# Altium PCB PCB1.PcbDoc
Units mil, origin at the board's own origin, x right, y up, seen from the top; angles counter-clockwise.
Board outline 3797.64 x 3149.61 mil, 2 copper layers (Top Layer, Bottom Layer); 74 components, 106 nets, 398 pads, 67 vias.
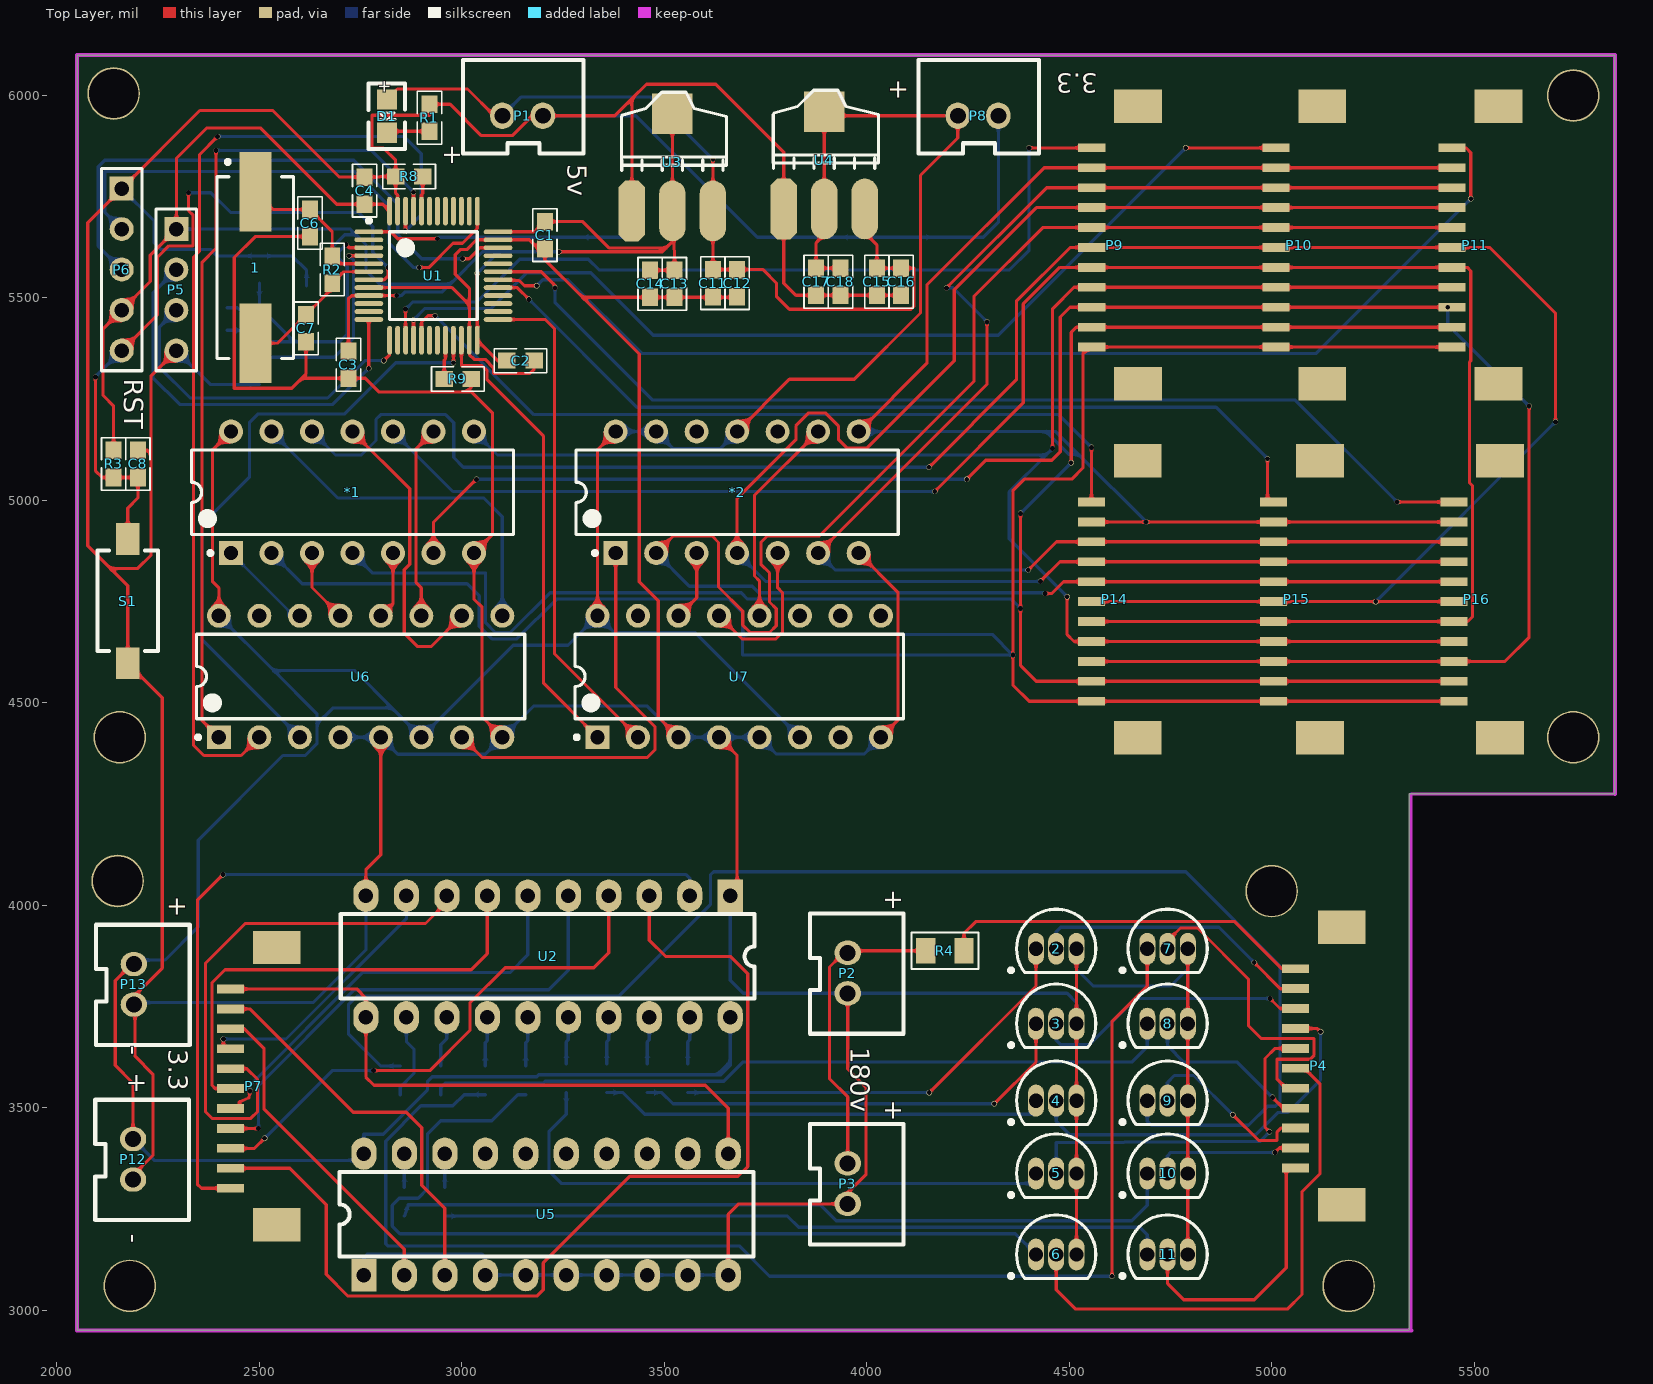
[diagram p0: Top Layer view]
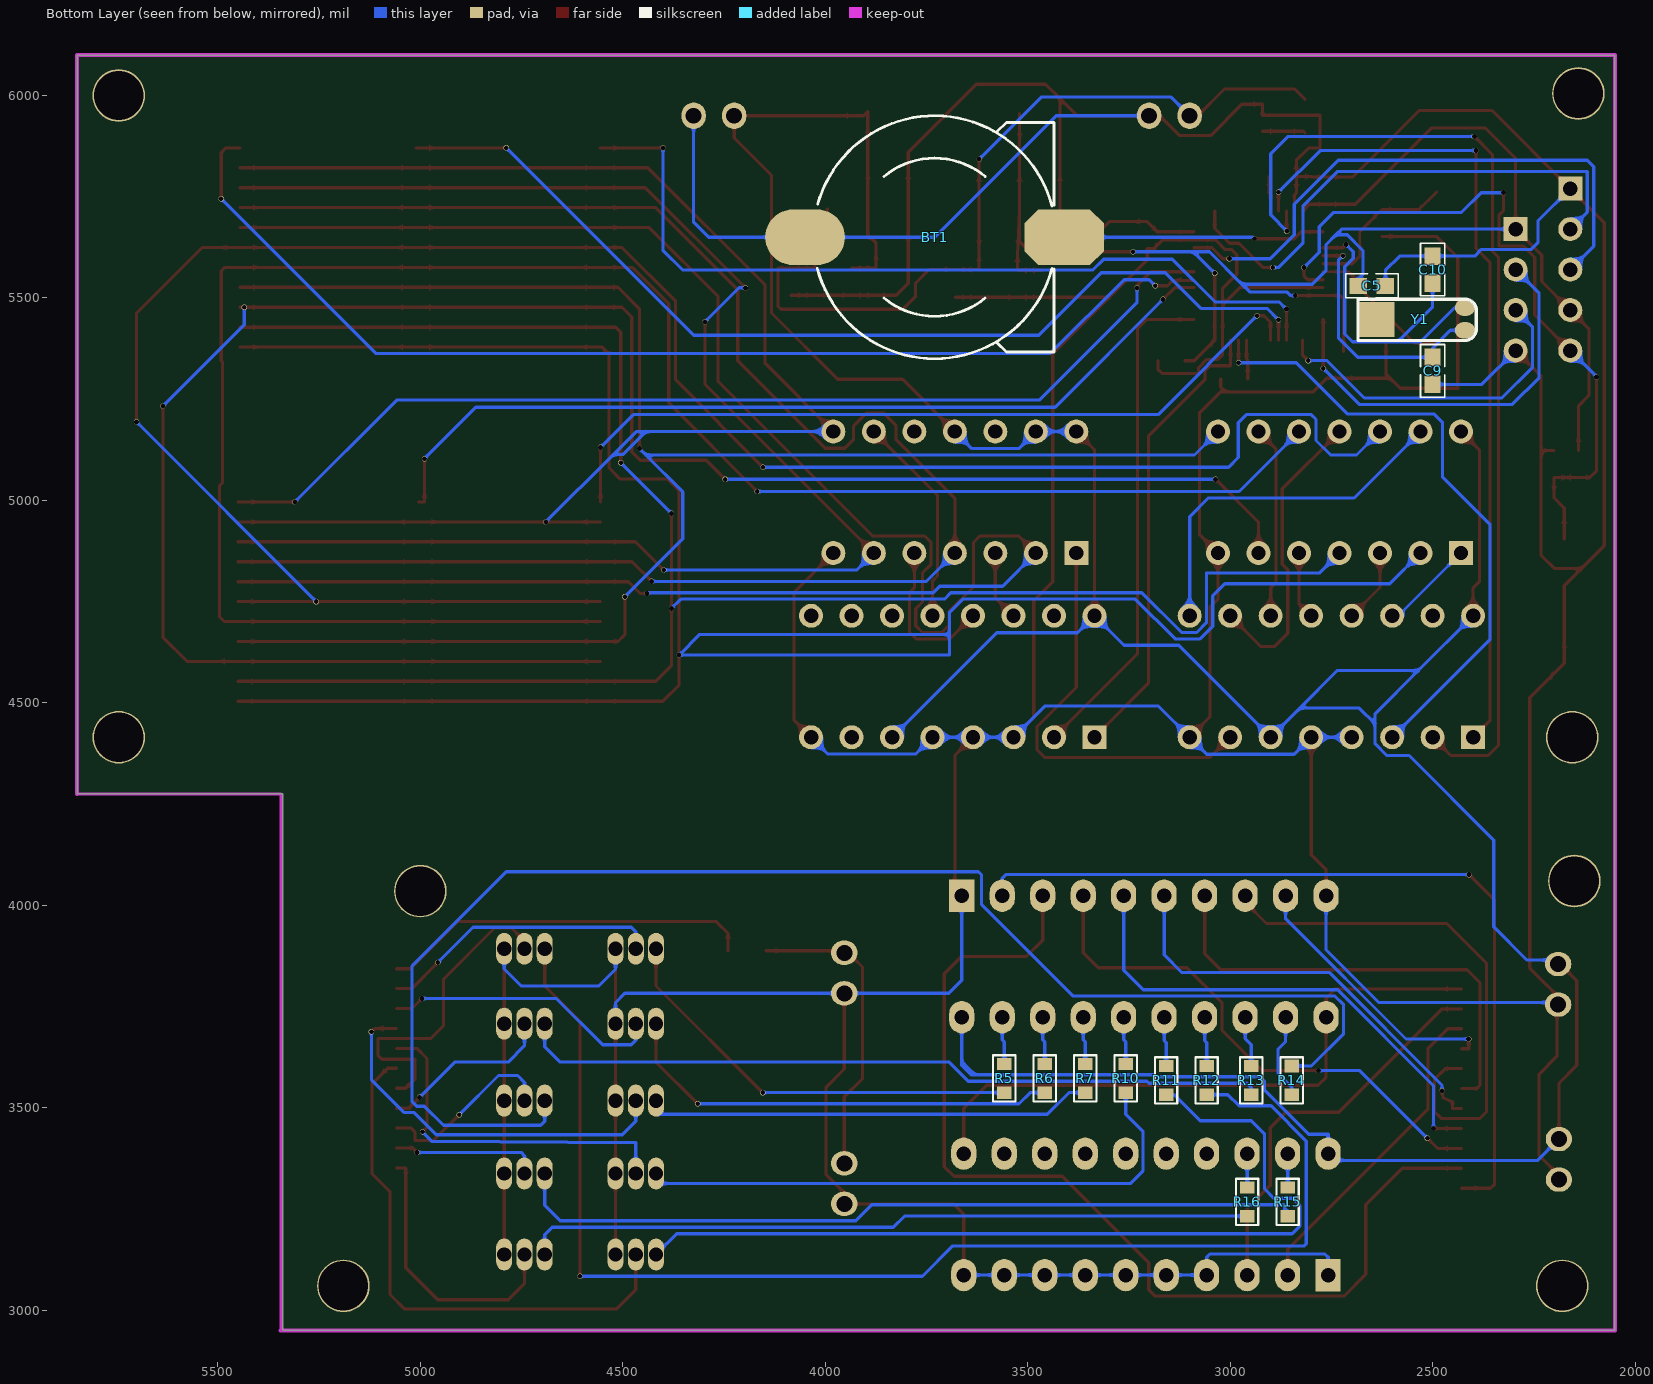
[diagram p1: Bottom Layer view, seen from below]
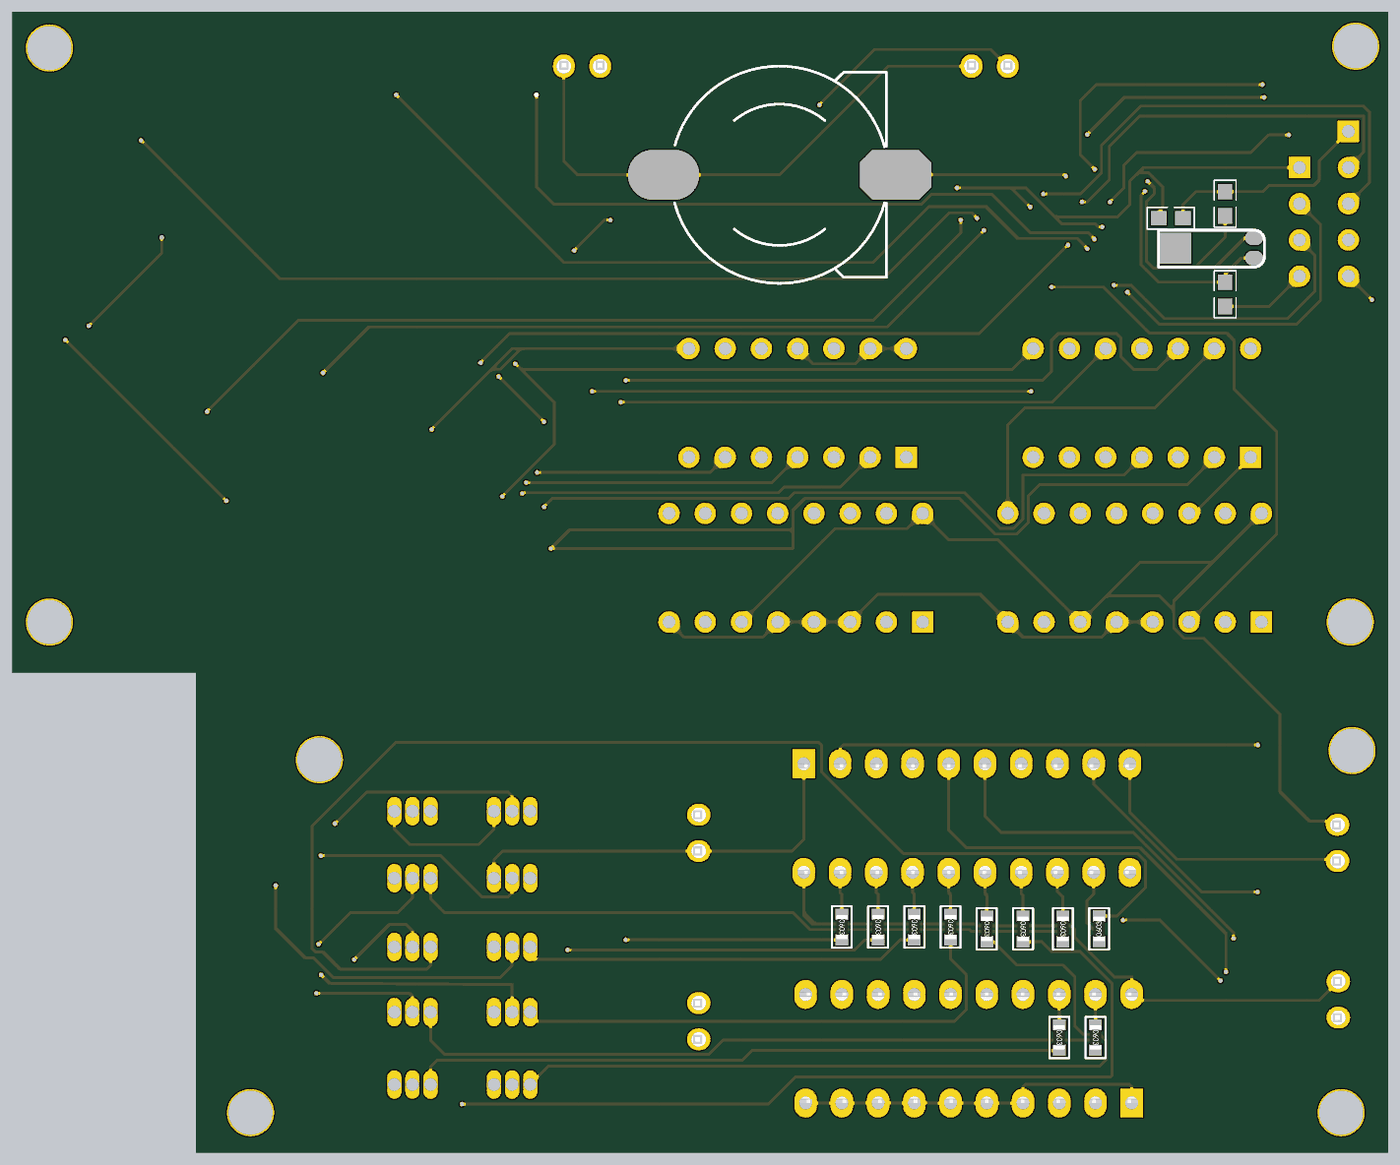
[diagram p2: 3D render of the assembled board from below, using the file's embedded part models]

## Layer stack, top to bottom
Top Solder: solder mask 0.4, Solder Resist, Dk 3.5
Top Layer: signal copper 1.4
Dielectric 1: dielectric 12.6, FR-4, Dk 4.8
Bottom Layer: signal copper 1.4
Bottom Solder: solder mask 0.4, Solder Resist, Dk 3.5

## Board outline
2050,2950 2050,6099.61 5847.64,6099.61 5847.64,4275 5340,4275 5340,2950

## Design rules (kind name [scope] priority, off if disabled: settings)
Clearance [All] p1: gap=7.87
PolygonConnect [All] p1: connectstyle=Relief reliefconductorwidth=10 reliefentries=4 polygonreliefangle="90 Angle" airgapwidth=10
RoutingVias [All] p1: holewidth=12 width=13 viastyle="Through Hole" minholewidth=12 minwidth=12 maxholewidth=28 maxwidth=50
SolderMaskExpansion [All] p1: expansion=4
Width [All] p1: maxlimit=200 minlimit=7 preferedwidth=7.87
30 further rules are at their usual default settings.

## Components (designator, comment, footprint, x,y, rotation, side; value= is the part's Value field where it differs from the comment)
1 "XTAL" 49S-SMD 2490,5575 r270 top
2 "13001" TO-92A 4468,3892.72 r270 top
3 "13001" TO-92A 4468,3707.72 r270 top
4 "13001" TO-92A 4468,3517.72 r270 top
5 "13001" TO-92A 4468,3337.72 r270 top
6 "13001" TO-92A 4468,3137.72 r270 top
7 "13001" TO-92A 4743,3892.72 r270 top
8 "13001" TO-92A 4743,3707.72 r270 top
9 "13001" TO-92A 4743,3517.72 r270 top
10 "13001" TO-92A 4743,3337.72 r270 top
11 "13001" TO-92A 4743,3137.72 r270 top
*1 "74hc04" DIP-14 2730,5020 r90 top
*2 "74hc04" DIP-14 3680,5020 r90 top
BT1 "Battery" CR1220 3730,5650 r90 bottom
C1 "Cap" 0603-1 3205,5655 r270 top
C2 "Cap" 0603-1 3145,5345 r0 top
C3 "Cap" 0603-1 2720,5335 r270 top
C4 "Cap" 0603-1 2760,5765 r90 top
C5 "Cap" 0603-1 2650,5530 r180 bottom
C6 "" 0603-1 2625,5685 r90 top
C7 "" 0603-1 2615,5425 r270 top
C8 "Cap" 0603-1 2200,5090 r270 top
C9 "" 0603-1 2500,5320 r90 bottom
C10 "" 0603-1 2500,5570 r90 bottom
C11 "Cap" 0603-1 3620,5536.54 r90 top
C12 "Cap" 0603-1 3680,5536.54 r90 top
C13 "Cap" 0603-1 3525,5535 r90 top
C14 "Cap" 0603-1 3465,5535 r90 top
C15 "Cap" 0603-1 4025,5540 r90 top
C16 "Cap" 0603-1 4085,5540 r90 top
C17 "Cap" 0603-1 3875,5540 r90 top
C18 "Cap" 0603-1 3935,5540 r90 top
D1 "LED0" LED0805 2815,5990 r270 top
P1 "5V_in" XH2.54-2 3100,5950 r180 top
P2 "180v_in" XH2.54-2 3953,3882.72 r90 top
P3 "180V_OUT" XH2.54-2 3953,3362.72 r90 top
P4 "Header 11" SMT11P 5173,3262.72 r90 top
P5 "Header 4" HDR1X4 2295,5670 r270 top
P6 "Header 5" HDR1X5 2160,5770 r270 top
P7 "Header 11" SMT11P 2543,3212.72 r90 top
P8 "3.3V_out" XH2.54-2 4225,5950 r180 top
P9 "Header 11" SMT11P 4670,5290 r90 top
P10 "Header 11" SMT11P 5125,5290 r90 top
P11 "Header 11" SMT11P 5560,5290 r90 top
P12 "3.3V_IN" XH2.54-2 2188,3422.72 r90 top
P13 "3.3V_OUT" XH2.54-2 2190,3855 r90 top
P14 "Header 11" SMT11P 4669.17,4415.35 r90 top
P15 "Header 11" SMT11P 5119.17,4415.35 r90 top
P16 "Header 11" SMT11P 5564.17,4415.35 r90 top
R1 "Res1" 0603-1 2920,5945 r270 top
R2 "" 0603-1 2680,5570 r90 top
R3 "Res1" 0603-1 2140,5090 r90 top
R4 "Res1" 0805-1R 4193,3887.72 r180 top
R5 "Res1" 0603R 3558,3572.72 r270 bottom
R6 "Res1" 0603R 3458,3572.72 r270 bottom
R7 "Res1" 0603R 3358,3572.72 r270 bottom
R8 "Res1" 0603-1 2870,5800 r180 top
R9 "Res1" 0603-1 2990,5300 r180 top
R10 "Res1" 0603R 3258,3572.72 r270 bottom
R11 "Res1" 0603R 3158,3567.72 r270 bottom
R12 "Res1" 0603R 3058,3567.72 r270 bottom
R13 "Res1" 0603R 2948,3567.72 r270 bottom
R14 "Res1" 0603R 2848,3567.72 r90 bottom
R15 "Res1" 0603R 2858,3267.72 r270 bottom
R16 "Res1" 0603R 2958,3267.72 r270 bottom
S1 "SW-PB" KEY-SMD1 2175,4905 r270 top
U1 "STM32F103C8T6" LQFP48_N 2930,5555 r0 top
U2 "74ACT573T" DIP-20 3273,3882.72 r270 top
U3 "AMS1117-3.3" AMS1117 3420,5715 r0 top
U4 "AMS1117-3.3" AMS1117 3795,5720 r0 top
U5 "74ACT573T" DIP-20 3148,3227.72 r90 top
U6 "74HC138" DIP-16 2750,4565 r90 top
U7 "74HC138" DIP-16 3685,4565 r90 top
Y1 "32.768K" XTAL32 2420,5420 r0 bottom

## Footprints (in the part's own frame and the unit in brackets; to place one, negate y for a bottom-side part, rotate by r counter-clockwise, add the part's x,y. Pads: shape width x height; smd on the part's side, far side on the other; paste and mask are expansions set on the pad)
49S-SMD [mm]
  rect 5x2 smd: 1(-4.75,0) 2(4.75,0)
  silkscreen extent -6.75,-2.4 5.7,2.4, body extent -6.7,-2.46 6.7,2.44, height 4
0603-1 [mm] "贴片带丝印"
  rect 1.1x1 smd: 1(-0.85,0) 2(0.85,0)
  silkscreen extent -1.65,-0.76 1.65,0.76, body extent -1.14,-0.38 1.14,0.38, height 1
0603R [mm]
  rect 0.762x0.9 smd: 1(-0.9,0)
  rect 0.8x0.9 smd: 2(0.9,0)
  silkscreen extent -1.45,-0.7 1.45,0.7, body extent -0.85,-0.4 0.85,0.4, height 0.56
0805-1R [mm] "small type  ver20150428"
  rect 1.2x1.6 smd: 1(-1.2,0) 2(1.2,0)
  silkscreen extent -2.1,-1.15 2.1,1.15, body extent -1.09,-0.64 1.21,0.7, height 0.76
AMS1117 [mil]
  oct 65x150 smd: 1(0.03,-0.06)
  oval 65x150 smd: 2(100.03,-0.06) 3(200.03,-0.06)
  rect 100x100 smd: 4(100.03,239.94)
  silkscreen extent -26,100 234,293
CR1220 [mm] "钮扣电池"
  oct 3.5x5 smd: 1(0,-8.128)
  oval 3.5x5 smd: 2(0,8.128)
  silkscreen extent -7.62,-7.5 7.62,7.36
DIP-14 [mm] "DIP; 14 Leads; Row Spacing 7.62 mm; Pitch 2.54 mm"
  rect 1.5x1.5 hole 0.9: 1(-3.81,7.62)
  round 1.5 hole 0.9: 2(-3.81,5.08) 3(-3.81,2.54) 4(-3.81,0) 5(-3.81,-2.54) 6(-3.81,-5.08) 7(-3.81,-7.62) 8(3.81,-7.62) 9(3.81,-5.08) 10(3.81,-2.54) 11(3.81,0) 12(3.81,2.54) 13(3.81,5.08) 14(3.81,7.62)
  silkscreen extent -3.93,-10.1 2.65,10.1, body extent -3.6,-10.1 3.6,10.1, height 5.08
DIP-16 [mm] "DIP; 16 Leads; Row Spacing 7.62 mm; Pitch 2.54 mm"
  rect 1.5x1.5 hole 0.9: 1(-3.81,8.89)
  round 1.5 hole 0.9: 2(-3.81,6.35) 3(-3.81,3.81) 4(-3.81,1.27) 5(-3.81,-1.27) 6(-3.81,-3.81) 7(-3.81,-6.35) 8(-3.81,-8.89) 9(3.81,-8.89) 10(3.81,-6.35) 11(3.81,-3.81) 12(3.81,-1.27) 13(3.81,1.27) 14(3.81,3.81) 15(3.81,6.35) 16(3.81,8.89)
  silkscreen extent -3.93,-10.3 2.65,10.31, body extent -3.6,-10.28 3.6,10.28, height 5.08
DIP-20 [mil]
  rect 80x62 hole 35.43: 1(-141,390)
  oval 80x62 hole 35.43: 2(-141,290) 3(-141,190) 4(-141,90) 5(-141,-10) 6(-141,-110) 7(-141,-210) 8(-141,-310) 9(-141,-410) 10(-141,-510) 11(159,-510) 12(159,-410) 13(159,-310) 14(159,-210) 15(159,-110) 16(159,-10) 17(159,90) 18(159,190) 19(159,290) 20(159,390)
  silkscreen extent -95,-572 113,450, body extent -141,-566 165,442, height 177
HDR1X4 [mm] "Connector; Header; 4 Position"
  rect 1.5x1.5 hole 0.9: 1(0,0)
  round 1.5 hole 0.9: 2(2.54,0) 3(5.08,0) 4(7.62,0)
  silkscreen extent -1.27,-1.27 8.89,1.27
HDR1X5 [mm] "Connector; Header; 5 Position"
  rect 1.5x1.5 hole 0.9: 1(0,0)
  round 1.5 hole 0.9: 2(2.54,0) 3(5.08,0) 4(7.62,0) 5(10.16,0)
  silkscreen extent -1.27,-1.27 11.43,1.27
KEY-SMD1 [mm]
  rect 2x1.5 smd: 1(0,0) 2(7.8,0)
  silkscreen extent 0.73,-1.9 7.03,1.9, body extent -0.06,-1.94 7.83,1.91, height 2.5
LED0805 [mil] "1/8W"
  rect 50x50 smd: 1(0,0) 2(82.3,0.2)
  silkscreen extent -40,-45 122,45, body extent 2,-25 80,25, height 20
LQFP48_N [mm] "Thin QFP, 48-Leads, Body 7x7mm, Pitch 0.5mm, IPC Medium Density"
  oval 1.8x0.3 smd: 1(-4.05,2.75) 2(-4.05,2.25) 3(-4.05,1.75) 4(-4.05,1.25) 5(-4.05,0.75) 6(-4.05,0.25) 7(-4.05,-0.25) 8(-4.05,-0.75) 9(-4.05,-1.25) 10(-4.05,-1.75) 11(-4.05,-2.25) 12(-4.05,-2.75) 25(4.05,-2.75) 26(4.05,-2.25) 27(4.05,-1.75) 28(4.05,-1.25) 29(4.05,-0.75) 30(4.05,-0.25) 31(4.05,0.25) 32(4.05,0.75) 33(4.05,1.25) 34(4.05,1.75) 35(4.05,2.25) 36(4.05,2.75)
  oval 0.3x1.8 smd: 13(-2.75,-4.05) 14(-2.25,-4.05) 15(-1.75,-4.05) 16(-1.25,-4.05) 17(-0.75,-4.05) 18(-0.25,-4.05) 19(0.25,-4.05) 20(0.75,-4.05) 21(1.25,-4.05) 22(1.75,-4.05) 23(2.25,-4.05) 24(2.75,-4.05) 37(2.75,4.05) 38(2.25,4.05) 39(1.75,4.05) 40(1.25,4.05) 41(0.75,4.05) 42(0.25,4.05) 43(-0.25,4.05) 44(-0.75,4.05) 45(-1.25,4.05) 46(-1.75,4.05) 47(-2.25,4.05) 48(-2.75,4.05)
  silkscreen extent -4.17,-2.75 2.75,3.57, body extent -3.5,-3.5 3.5,3.5, height 1.6
SMT11P [mm]
  rect 2.1x3 smd: 0(-0.05,0) 0(17.35,0)
  rect 0.55x1.7 smd: 1(2.25,2.9) 2(3.5,2.9) 3(4.75,2.9) 4(6,2.9) 5(7.25,2.9) 6(8.5,2.9) 7(9.75,2.9) 8(11,2.9) 9(12.25,2.9) 10(13.5,2.9) 11(14.75,2.9)
TO-92A [mm] "TO, Flat Index; 3 In-Line, Axial Leads; Body Dia. 4.5mm; Leads 0.51 x 0.48 mm (max)"
  oval 2x1 hole 0.9: 1(0,-1.27) 2(0,0) 3(0,1.27)
  silkscreen extent -2.48,-2.95 1.5,2.48, body extent -2.5,-2.5 1.5,2.5, height 6.86
XH2.54-2 [mil]
  oval 60x65 hole 39.37: 1(0,0) 2(-100.1,0)
  silkscreen extent -200,-138 97,93, body extent -198,-142 98,94, height 276
XTAL32 [mil]
  oval 50x40 smd: 1(0,0) 2(0,-56)
  rect 92.13x86 smd: ""(220,-27)
  silkscreen extent -28,-77 264,25

## Part data
1: "Crystal Oscillator"
2 3 4 5 6 7 8 9 10 11: "NPN三极管"
*1 *2: "非门"
BT1: "备份电池"
C1 C2 C3 C4 C5 C8 C11 C12 C13 C14 C15 C16 C17 C18: "Capacitor"
C6 C7 C9 C10: library part Cap, "Capacitor"
D1: "Typical INFRARED GaAs LED"
P1 P2 P3 P8 P12 P13: library part "Header 2", "Header, 2-Pin"
P4 P7 P9 P10 P11 P14 P15 P16: "Header, 11-Pin"
P5: "Header, 4-Pin"
P6: "Header, 5-Pin"
R1 R3 R4 R5 R6 R7 R8 R9 R10 R11 R12 R13 R14 R15 R16: "Resistor"
R2: library part Res2, "Resistor"
S1: "Switch"
U1: "STM32 ARM-based 32-bit MCU with 64 Kbytes Flash, 48-pin LQFP, Industrial Temperature"
U2 U5: "双向数据传输"
U3 U4: library part AMS1117
U6 U7: "138译码器"
Y1: library part XTAL_1, "Crystal Oscillator"

## Free pads (board coordinates)
  round 129.92 hole 122.05: 0(2140,6005) 1(5745,4415) 2(2155,4415) 3(5745,6000) 4(2180,3060) 5(2150,4060) 6(5190,3060) 7(5000,4035)

## Via types
v1: diameter 13, hole 12, Top Layer to Bottom Layer, 63 vias
v2: diameter 12, hole 12, Top Layer to Bottom Layer, 4 vias

## Nets (pads, with @x,y where several pads share a name; then routed paths per layer and width w, separated by ;. In a path a pad name is that pad's centre, name@x,y a point inside that pad or via, vN(x,y) a via of type N, cw(c..) or ccw(c..) an arc to the next point about the centre after c; other vN are vias at no path point)
BOOT0: R8.1 U1.44 | length 86.8
  Top Layer w7.87: U1.44 2900.47,5755 2903.46,5757.99 R8.1
BOOT1: R9.2 U1.20 | length 96.8
  Top Layer w7.87: R9.2 2956.54,5346 2959.53,5348.99 U1.20
C1_1: 2.2 P4.10 | length 700.1
  Top Layer w7.87: v1(4957,3858.72) 5021.5,3794.21 P4.10
  Bottom Layer w7.87: 2.2 4468,3934.72 4479,3945.72 4870,3945.72 v1(4957,3858.72)
C1_2: 3.2 P4.9 | length 693.8
  Top Layer w7.87: v1(4996,3769.72) 5020.72,3745 P4.9
  Bottom Layer w7.87: 3.2 4468,3666.72 4479,3655.72 4550,3655.72 4664,3769.72 v1(4996,3769.72)
C1_3: 4.2 P4.8 | length 958.1
  Top Layer w7.87: P4.8 5112.93,3695.79 v1(5121,3687.71)
  Bottom Layer w7.87: 4.2 4468,3466.72 4501.5,3433.22 4960.5,3433.22 5015.23,3487.95 5039.48,3487.95 5121,3569.47 v1(5121,3687.71)
C1_4: 5.2 P4.7 | length 883.8
  Top Layer w7.87: v1(4995,3440.72) 4983.63,3452.08 4983.63,3621.58 5008.63,3646.57 P4.7
  Bottom Layer w7.87: 5.2 4468,3413.72 4971.75,3417.47 v1(4995,3440.72)
C1_5: 6.2 P4.6 | length 1344.3
  Top Layer w7.87: 6.2 4468,3050.72 4516,3002.72 5039,3002.72 5075,3038.72 5075,3292.72 5119.85,3337.57 5119.85,3558.51 5081,3597.36 P4.6
C1_6: 7.2 P4.5 | length 815.2
  Top Layer w7.87: 7.2 4743,3911.9 4775,3943.9 4816.82,3943.9 4943,3817.72 4943,3702.72 4975,3670.72 5105,3670.72 5105,3630 5095,3620 5013.55,3620 5013.55,3570.6 5036,3548.15 P4.5
C1_7: 8.2 P4.4 | length 434.5
  Top Layer w7.87: v1(5002,3525.72) 5028.78,3498.94 P4.4
  Bottom Layer w7.87: 8.2 4743,3652.72 4783,3612.72 4915,3612.72 v1(5002,3525.72)
C1_8: 9.2 P4.3 | length 459.6
  Top Layer w7.87: v1(4904,3482.72) 4967.71,3419 5013.55,3419 5013.55,3440.27 5023,3449.72 P4.3
  Bottom Layer w7.87: 9.2 4743,3562.72 4760,3579.72 4807,3579.72 v1(4904,3482.72)
C1_9: 10.2 P4.2 | length 367.6
  Top Layer w7.87: v1(5008,3389.72) 5018.8,3400.51 P4.2
  Bottom Layer w7.87: 10.2 4743,3381.72 4751,3389.72 v1(5008,3389.72)
C1_10: 11.2 P4.1 | length 683.7
  Top Layer w7.87: 11.2 4743,3065.72 4783,3025.72 4957,3025.72 5036,3104.72 5036,3351.3 P4.1
D1_1: R5.1 U2.19 | length 117.6
  Bottom Layer w7.87: R5.1 3558,3662.72 3563,3667.72 U2.19
D1_2: R6.1 U2.18 | length 117.6
  Bottom Layer w7.87: R6.1 3458,3662.72 3463,3667.72 U2.18
D1_3: R7.1 U2.17 | length 117.6
  Bottom Layer w7.87: R7.1 3358,3662.72 3363,3667.72 U2.17
D1_4: R10.1 U2.16 | length 117.6
  Bottom Layer w7.87: R10.1 3258,3662.72 3263,3667.72 U2.16
D1_5: R11.1 U2.15 | length 122.6
  Bottom Layer w7.87: R11.1 3158,3660.72 3163,3665.72 U2.15
D1_6: R12.1 U2.14 | length 122.6
  Bottom Layer w7.87: R12.1 3058,3660.72 3063,3665.72 U2.14
D1_7: R13.1 U2.13 | length 126.8
  Bottom Layer w7.87: R13.1 2948,3655.72 2963,3670.72 U2.13
D1_8: R14.1 U2.12 | length 213.4
  Bottom Layer w7.87: R14.1 2848,3550.72 2882,3584.72 2882,3644.72 2863,3663.72 U2.12
D1_9: R15.1 U5.19 | length 83.6
  Bottom Layer w7.87: R15.1 U5.19
D1_10: R16.1 U5.18 | length 83.6
  Bottom Layer w7.87: R16.1 U5.18
GND: 2.3 3.3 4.3 5.3 6.3 7.3 8.3 9.3 10.3 11.3 *1.7 *2.7 BT1.2 C1.2 C2.2 C3.2 C4.2 C5.2 C6.1 C7.2 C8.1 C9.1 C10.2 C11.1 C12.1 C13.1 C14.1 C15.1 C16.1 C17.1 C18.1 P1.2 P2.2 P3.2 P5.4 P6.1 P8.2 P12.2 P13.2 R1.1 R8.2 R9.1 S1.2 U1.8 U1.23 U1.35 U1.47 U2.1 U2.10 U3.1 U4.1 U5.1 U5.4 U5.5 U5.6 U5.7 U5.8 U5.9 U5.10 U6.4 U6.5 U6.8 U7.3 U7.4 U7.5 U7.8 | length 22436.1
  Top Layer w7.87: P12.2 2188,3333 2237,3382 2237,3582.72 2193,3626.72 2193,3754.9 2169.9,3754.9 2260,3845 2260,4512.91 S1.2 2175,4789 2132,4832 ; C8.1 2224,5123.46 2232,5115.46 ; P5.4 2232,5307 2232,5115.46 ; C7.2 2615,5312 2604.54,5301.54 ; C6.1 2489.54,5651.54 2438,5600 2438,5277 2580,5277 2604.54,5301.54 ; U2.10 2763,4088 2800,4125 U6.5 ; U1.8 2976,5525.47 3018.58,5482.89 ; U1.47 2841.42,5754 2836.54,5758.88 R8.2 ; R9.1 3023.46,5280 3011.46,5268 ; U6.8 3050,4465 3050,4736 3030,4756 *1.7 3076,4916 3076,5215.46 3023.46,5268 3011.46,5268 ; C2.2 3178.46,5323.97 3168,5313.5 3078.07,5313.5 3078.07,5328 3057.76,5348.31 3030.28,5348.31 3018.58,5360 U1.23 3018.58,5482.89 ; U3.1 3420.03,5992.03 ; U7.3 3485,4465 3485,4752 3438,4799 3438,5361.47 3297.93,5501.54 ; U7.4 3680,4370 U2.1@3680,4035 ; U5.10 3658,3236.72 3683.9,3262.62 P3.2 3953,3289.72 3998,3334.72 3998,3550.72 3953,3595.72 P2.2 ; C12.1@3678.47,5501.54 C13.1 C14.1 3297.93,5501.54 ; *2.7 4077,4773 4077,4457 U7.8 ; C16.1 C15.1 C18.1 C17.1 3825,5506.54 3795.03,5536.5 U4.1 3795.03,5860 3627.03,6028 3456,6028 3420.03,5992.03 ; 6.3 5.3 4.3 3.3 2.3 ; 11.3 10.3 9.3 8.3 7.3 ; 2132,4832 2200,4832 2232,4864 2232,5115.46 ; 2132,4832 2076,4888 2076,5686 P6.1 2353,5963 2533.46,5963 2698,5798.46 C4.2 2797,5798.46 2798.54,5800 R8.2 ; 2604.54,5301.54 C3.2 2761.46,5301.54 2795,5268 3011.46,5268 ; R8.2 2836.54,5840 2806.54,5870 2778,5870 2778,5951 2920,5951 R1.1 2971,5978.46 3048.46,5901 3125,5901 3174,5950 P1.2 3378,5950 3420.03,5992.03 ; 3018.58,5482.89 3018.58,5523.69 2983.69,5558.59 2983.69,5607 2995.95,5619.27 3011.95,5619.27 3036.27,5643.58 U1.35 3166.95,5643.58 3189,5621.54 C1.2 3205,5594.47 3297.93,5501.54
  Bottom Layer w7.87: P6.1 2240,5690 2240,5636 2256,5620 2379.46,5620 2396,5603.46 C10.2 2581.07,5603.46 2616.54,5568 C5.2 ; P13.2@2193,3760 2633.28,3760 2763,3889.72 U2.10 ; P5.4 2378.46,5286.54 C9.1 ; U6.4 U6.5 2842,4373 3058,4373 U6.8 3177,4492 3458,4492 U7.3 U7.4 U7.5 3776.34,4373.66 3993.66,4373.66 U7.8 ; U5.1 2758,3130.72 2766,3138.72 3050,3138.72 3058,3130.72 U5.4 U5.5 U5.6 U5.7 U5.8 U5.9 U5.10 ; P1.2 3430,5950 3730,5650 BT1.2 4288,5650 4325.1,5687.1 P8.2 ; U2.1 3663,3814.62 3695,3782.62 P2.2 4495,3782.62 4518,3759.62 3.3 ; 2.3 4518,3841.72 4559,3800.72 4751,3800.72 4793,3842.72 7.3
LE: P7.11 U2.11 U5.11 | length 1577.5
  Top Layer w7.87: P7.11 2740.29,3793.42 2763,3770.72 U2.11 2763,3575.72 2783,3555.72 3601,3555.72 3658,3498.72 U5.11
Net2_1: 2.1 R5.2 | length 1061.1
  Top Layer w7.87: v1(4154.57,3537.28) 4418,3800.72 2.1
  Bottom Layer w7.87: R5.2 v1(4154.57,3537.28)
Net3_1: 3.1 R6.2 | length 1109.1
  Top Layer w7.87: v1(4315,3509.72) 4418,3612.72 3.1
  Bottom Layer w7.87: R6.2 3494,3537.28 3521.57,3509.72 v1(4315,3509.72)
Net4_1: 4.1 R7.2 | length 1116.2
  Bottom Layer w7.87: R7.2 3398,3537.28 3451.57,3483.72 4418,3483.72 4.1
Net5_1: 5.1 R10.2 | length 1451.6
  Bottom Layer w7.87: R10.2 3258,3483.72 3215,3440.72 3215,3344.72 3247,3312.72 4418,3312.72 5.1
Net6_1: 6.1 R11.2 | length 2192.6
  Bottom Layer w7.87: R11.2 3138.57,3532.28 3074.08,3467.79 2948.15,3467.79 2915.08,3434.72 2915.08,3299.41 2892,3276.34 2845.62,3276.34 2828,3258.72 2828,3207.72 2847,3188.72 4367,3188.72 6.1
Net7_1: 7.1 R12.2 | length 3219.6
  Top Layer w7.87: v1(4606,3083.72) 4606,3713.72 4693,3800.72 7.1
  Bottom Layer w7.87: R12.2 3005.56,3532.28 2978,3504.72 2899,3504.72 2812,3417.72 2812,3163.72 2817,3158.72 3685,3158.72 3760,3083.72 v1(4606,3083.72)
Net8_1: 8.1 R13.2 | length 1861.2
  Bottom Layer w7.87: R13.2 2948,3549.59 2959,3560.59 3200.56,3560.59 3205.56,3565.59 3646.75,3565.59 3693.87,3612.72 4655,3612.72 4693,3650.72 8.1
Net9_1: 9.1 R14.2 | length 3550.3
  Bottom Layer w7.87: R14.2 2799.62,3603.15 2720,3682.77 2720,3754.72 2741,3775.72 3388,3775.72 3614,4001.72 3614,4074.72 3622,4082.72 4788,4082.72 5020.31,3850.4 5020.31,3514.72 5009.29,3503.7 4989.98,3503.7 4943,3456.72 4703,3456.72 4693,3466.72 9.1
Net10_1: 10.1 R15.2 | length 1966.2
  Bottom Layer w7.87: R15.2 2867.87,3260.59 3885.13,3260.59 3924.91,3220.8 4655,3220.8 4693,3258.8 10.1
Net11_1: 11.1 R16.2 | length 1802.9
  Bottom Layer w7.87: R16.2 3804.43,3232.28 3831.66,3205.06 4674.66,3205.06 4693,3186.72 11.1
NetBT1_1: BT1.1 U1.1 | length 648
  Top Layer w7.87: U1.1 2824.71,5663.27 2841.65,5646.33 v2(2939.98,5646.33)
  Bottom Layer w7.87: v2(2939.98,5646.33) 2943.66,5650 BT1.1
NetC9_2: C9.2 U1.4 Y1.1 | length 629.8
  Top Layer w7.87: v1(2721.54,5604.21) U1.4
  Bottom Layer w7.87: Y1.1 2456,5420 2500,5376 C9.2 2684.84,5353.46 2732.68,5401.3 2732.68,5593.08 v1(2721.54,5604.21)
NetC10_1: C10.1 U1.3 Y1.2 | length 816.7
  Top Layer w7.87: v1(2713.9,5631.9) 2721.9,5623.9 U1.3
  Bottom Layer w7.87: Y1.2 2446,5476 2530,5392 2586,5392 ; C10.1 2500,5478 2586,5392 ; v1(2713.9,5631.9) 2696,5614 2696,5598 2716.93,5577.07 2716.93,5410.93 2698,5392 2586,5392
NetD1_2: D1.2 R1.2 | length 106.4
  Top Layer w7.87: D1.2 2819.04,5911.54 R1.2
NetP4_11: P4.11 R4.1 | length 921.7
  Top Layer w7.87: R4.1 4240.24,3930.72 4269.18,3959.65 4909.07,3959.65 5025.29,3843.42 P4.11
NetP7_1: P7.1 U2.2 | length 2076.2
  Top Layer w7.87: v1(2410,4075.72) 2347,4012.72 2347,3311.3 2357,3301.3 P7.1
  Bottom Layer w7.87: v1(2410,4075.72) 3554,4075.72 3563,4066.72 U2.2
NetP7_2: P7.2 U2.3 | length 2543.3
  Top Layer w7.87: P7.2 2575.2,3350.51 2665,3260.72 2665,3088.72 2719,3034.72 3185,3034.72 3201,3050.72 3201,3116.72 3415,3330.72 3682,3330.72 3706,3354.72 3706,3830.72 3663,3873.72 3503,3873.72 3463,3913.72 U2.3
NetP7_3: P7.3 U2.4 | length 1315.1
  Top Layer w7.87: P7.3 2488.01,3399.72 v1(2513,3424.72) ; v1(2782,3591.72) 2921,3591.72 3020,3690.72 3020,3758.72 3107,3845.72 3326,3845.72 3363,3882.72 U2.4
  Bottom Layer w7.87: v1(2513,3424.72) 2680,3591.72 v1(2782,3591.72)
NetP7_4: P7.4 U2.5 | length 1242.3
  Top Layer w7.87: P7.4 v1(2498.01,3448.94)
  Bottom Layer w7.87: v1(2498.01,3448.94) 2498.01,3555 2734.48,3791.46 3215,3791.46 3263,3839.46 U2.5
NetP7_5: P7.5 U2.6 | length 1060.8
  Top Layer w7.87: P7.5 2451,3498.15 2451,3514.72 2474.1,3524.72 v1(2477,3541.72)
  Bottom Layer w7.87: v1(2477,3541.72) 2477,3556.26 2754.46,3833.72 3119,3833.72 3163,3877.72 U2.6
NetP7_6: P7.6 U2.7 | length 1155.3
  Top Layer w7.87: P7.6 2391,3547.36 2383,3555.36 2383,3808.72 2415,3840.72 3023,3840.72 3063,3880.72 U2.7
NetP7_7: P7.7 U2.8 | length 1340.9
  Top Layer w7.87: P7.7 2468.74,3596.57 2495.31,3570 2495.31,3490.03 2479,3473.72 2383,3473.72 2367,3489.72 2367,3857 2465,3955 2910.28,3955 2963,4007.72 U2.8
NetP7_8: P7.8 U2.9 | length 673.7
  Top Layer w7.87: v1(2411,3669.72) 2411,3645.79 P7.8
  Bottom Layer w7.87: v1(2411,3669.72) 2565.8,3669.72 2863,3966.92 U2.9
NetP7_9: P7.9 U5.2 | length 806.1
  Top Layer w7.87: P7.9 2463,3695 2511.06,3646.94 2511.06,3497.66 2858,3150.72 U5.2
NetP7_10: P7.10 U5.3 | length 981.4
  Top Layer w7.87: P7.10 2476.5,3744.21 2732,3488.72 2863,3488.72 2901,3450.72 2901,3308.72 2958,3251.72 U5.3
PA0: U1.10
PA1: U1.11
PA2: P5.2 U1.12 | length 1009.5
  Top Layer w7.87: v1(2770,5326) 2770,5446.73 U1.12
  Bottom Layer w7.87: P5.2 2237,5512 2237,5303 2303,5237 2681,5237 v1(2770,5326)
PA3: P5.3 U1.13 | length 838.6
  Top Layer w7.87: v1(2807.21,5345.21) 2821.73,5359.73 U1.13
  Bottom Layer w7.87: P5.3 2253,5428 2253,5329 2329,5253 2668.62,5253 2760.83,5345.21 v1(2807.21,5345.21)
PA4: U1.14
PA5: P9.11 U1.15 | length 2106.6
  Top Layer w7.87: U1.15 v1(2861.1,5472.41) ; v1(4401,5870.71) P9.11
  Bottom Layer w7.87: v1(2861.1,5472.41) 2878.75,5490.06 3037.07,5490.06 3142.61,5595.61 3312.47,5595.61 3339.08,5569 4352,5569 4401,5618 v1(4401,5870.71)
PA6: P10.11 U1.16 | length 2484
  Top Layer w7.87: U1.16 v1(2880.79,5446) ; v1(4788,5870.71) P10.11
  Bottom Layer w7.87: v1(2880.79,5446) 2909.1,5474.31 3072.31,5474.31 3160,5562 3318.5,5562 3472.5,5408 4325.29,5408 v1(4788,5870.71)
PA7: P14.11 U1.17 | length 1975.2
  Top Layer w7.87: U1.17 2900.47,5440 2916.47,5456 v1(2934,5456) ; P14.11 v1(4555,5131)
  Bottom Layer w7.87: v1(2934,5456) 3178,5212 4474,5212 v1(4555,5131)
PA8: P15.11 U1.29 | length 2197.5
  Top Layer w7.87: U1.29 3137,5525.47 v1(3166,5496.47) ; v1(4990,5103) 4990,4996.06 P15.11
  Bottom Layer w7.87: v1(3166,5496.47) 3432.47,5230 4863,5230 v1(4990,5103)
PA9: P11.11 U1.30 | length 2810.9
  Top Layer w7.87: U1.30@3091.42,5543.19 3141.55,5543.19 3154.74,5530 v1(3185,5530) ; P11.11 5480,5870.71 5492,5858.71 v1(5492,5745)
  Bottom Layer w7.87: v1(3185,5530) 3200.16,5545.16 3262.09,5545.16 3444.25,5363 5110,5363 v1(5492,5745)
PA10: P16.11 U1.31 | length 2614.4
  Top Layer w7.87: U1.31 3196.34,5564.84 v1@3230,5531.18 ; v1(5309.94,4996.06) P16.11
  Bottom Layer w7.87: v1(3230,5525) 3230,5489.5 3471.72,5247.79 5058.21,5247.79 v1(5309.94,4996.06)
PA11: U1.32
PA12: U1.33
PB0: U1.18
PB1: U1.19
PB3: U1.39
PB4: U1.40
PB5: U1.41
PB6: U1.42
PB7: U1.43
PB8: U1.45 U6.1 | length 2058
  Top Layer w7.87: v1(2393,5864) 2393,5622.33 2358,5587.33 2358,4457 U6.1 ; U1.45 v1(2880.79,5761.21)
  Bottom Layer w7.87: v1(2393,5864) 2778,5864 v1(2880.79,5761.21)
PB9: U1.46 U6.2 | length 2498.5
  Top Layer w7.87: v1(2397,5899) 2352.09,5854.09 2352.09,5615.09 2337,5600 2337,4396 2363,4370 2455,4370 U6.2 ; v1(2860,5665) 2861.1,5666.1 U1.46
  Bottom Layer w7.87: v1(2397,5899) 2857,5899 2900,5856 2900,5705 v1(2860,5665)
PB10: U1.21 U6.3 | length 1546.8
  Top Layer w7.87: v1(2979.21,5340) U1.21
  Bottom Layer w7.87: U6.3 2358,4657 2358,4940 2476,5058 2476,5193 2496,5213 2710,5213 2837,5340 v1(2979.21,5340)
PB11: U1.22 U7.1 | length 1148.9
  Top Layer w7.87: U1.22 2998.9,5333.67 3000.01,5332.56 3049.76,5332.56 3062.32,5320 3062.32,5297.75 3202,5158.08 3202,4548 U7.1
PB12: U1.25 U7.2 | length 1243.3
  Top Layer w7.87: U1.25 3206.27,5446.73 3229,5424 3229,4621 U7.2
PB13: U1.26
PB14: U1.27
PB15: U1.28
PH0: 1.2 C7.1 R2.1 U1.6 | length 361.5
  Top Layer w7: 1.2 2544.53,5387.99 C7.1 2680,5523.46 R2.1 2708.31,5564.84 U1.6
PH1: 1.1 C6.2 R2.2 U1.5 | length 389.2
  Top Layer w7: 1.1 2533.54,5718.46 C6.2 2680,5663.46 R2.2
  Top Layer w7.87: R2.2 2698.94,5584.53 U1.5
RESET: C8.2 P6.5 R3.1 S1.1 U1.7 | length 1778
  Top Layer w7.87: v1(2095,5305) 2095,5073.54 2112,5056.54 R3.1 C8.2 2200,5006 2175,4981 S1.1 ; P6.5 2248,5458 2248,5600 2276.66,5628.66 2336.34,5628.66 2336.34,5704.42 2325,5715.76 v2(2325,5760) ; U1.7 2808,5545.16 2818,5555.16 v1(2818,5575)
  Bottom Layer w7.87: v1(2095,5305) P6.5 ; v2(2325,5760) 2380,5760 2428.66,5711.34 2744.66,5711.34 2780,5676 2780,5613 v1(2818,5575)
SWDCLK: P6.2 U1.37 | length 1314.3
  Top Layer w7.87: v1(2895,5575) 2918.19,5575 2978.2,5635.01 3001.65,5635.01 3038.27,5671.63 U1.37
  Bottom Layer w7.87: P6.2 2118,5712 2118,5812 2736,5812 2820,5728 2820,5636.48 2881.48,5575 v1(2895,5575)
SWDIO: P6.3 U1.34 | length 1428
  Top Layer w7.87: v1(3002,5597) 3018,5597 3044.9,5623.9 U1.34
  Bottom Layer w7.87: P6.3 2102,5628 2102,5824 2118,5840 2733,5840 2841.65,5731.35 2841.65,5656 2900.65,5597 v1(3002,5597)
VCC-3.3: C1.1 C2.1 C3.1 C4.1 C5.1 C13.2 C14.2 P5.1 P6.4 R3.2 U1.9 U1.24 U1.36 U1.48 U3.2 U3.4 | length 4691.6
  Top Layer w7.87: R3.2 2140,5233 2114,5259 2114,5424 P6.4 2230.55,5540.55 2230.55,5605.55 P5.1 2295,5844.42 2370.58,5920 2502.54,5920 2691,5731.54 C4.1 2804.64,5731.54 U1.48 ; C3.1 2720,5497.79 2728,5505.79 U1.9 v2(2839.21,5505.79) ; v1(3038.27,5561.27) U1.24 3088.82,5345 C2.1 ; U1.36 3179.8,5663.27 C1.1 3299,5688.46 3364.46,5623 3504,5623 ; v1(3240,5614) 3495,5614 3504,5623 ; C14.2 C13.2 3525,5604 U3.2 ; U3.4 U3.2 ; 3504,5623 3520.03,5639.03 U3.2
  Bottom Layer w7.87: P5.1 2725,5670 2739,5656 ; C5.1 2683.46,5547 2672,5558.46 2672,5617 2711,5656 2739,5656 ; v2(2839.21,5505.79) 2850.79,5505.79 2860,5515 2952,5515 2971,5534 ; v1(3038.27,5561.27) 3091,5614 ; v1(3240,5614) 3091,5614 ; 2739,5656 2763,5632 2763,5568 2797,5534 2971,5534 ; 2971,5534 3051,5614 3091,5614
VCC-3.3EX: *1.14 *2.11 *2.13 *2.14 C17.2 C18.2 P8.1 P12.1 P13.1 U2.20 U4.2 U4.4 U5.20 U6.6 U6.16 U7.6 U7.16 | length 8474.8
  Top Layer w7.87: P12.1 2188,3560.72 2144,3604.72 2144,3814 P13.1@2193,3863 ; U6.16 2400,4784 2384,4800 2384,5124 *1.14 ; U7.16 3335,5125 *2.14 ; *2.11 3809,5299 3969,5299 4132.75,5462.75 4132.75,5802.75 4225,5895 P8.1 ; C18.2 C17.2 3875,5636 3895.03,5656.03 U4.2 U4.4 3904.97,5950 4192,5950
  Bottom Layer w7.87: P13.1@2172.64,3867.36 2175,3865 2267.28,3865 2349,3946.72 2349,4161 2558,4370 2613.46,4370 2642,4398.54 2642,4448 ; P12.1 2240,3370.72 2240,3370 2741.28,3370 U5.20 2758,3434.72 2806,3434.72 2915,3543.72 2915,3564.34 2927,3576.34 3185,3576.34 3190,3581.34 3631,3581.34 ; U6.16 2534.98,4580.02 ; *2.14 *2.13 3522,5128 3638,5128 *2.11 ; U2.20 3663,3613.34 ; U7.6 3577,4673 3377,4673 U7.16 3262.16,4642.16 3127.16,4642.16 U6.6 2827.96,4487.04 ; 2534.98,4580.02 2642,4473 2642,4448 ; 2534.98,4580.02 2734.98,4580.02 2827.96,4487.04 ; 2642,4448 2681.04,4487.04 2827.96,4487.04 ; 3631,3581.34 3663,3613.34 ; 3631,3581.34 3639.62,3581.34 3663,3604.72 3663,3613.34
VCC-5.0: C11.2 C12.2 C15.2 C16.2 D1.1 P1.1 U3.3 U4.3 | length 2103.2
  Top Layer w7.87: D1.1 2841,6016 3014,6016 3080,5950 P1.1 ; U3.3@3620,5642 C11.2 C12.2 3744,5570 3777,5537 3777,5504 3809,5472 4109,5472 4117,5480 4117,5573.46 C16.2 C15.2 4025,5631 3995.03,5660.97 U4.3 ; U3.3@3620.03,5642.03 U3.3 v1(3620.03,5843)
  Bottom Layer w7.87: P1.1 3146,5996 3467.03,5996 v1(3620.03,5843)
VCC_180V: P2.1 P3.1 R4.2 | length 761.1
  Top Layer w7.87: P3.1 3953,3526.72 3908,3571.72 3908,3847.72 3943,3882.72 P2.1 3953.26,3882.48 P2.1@3960.57,3875.86 ; P2.1@3958,3887.72 R4.2
Y1: *1.1 U6.14 | length 241.8
  Bottom Layer w7.87: *1.1 2572,4728 2572,4715 U6.14
Y1_N: *1.2 P9.1 P10.1 P11.1 P14.1 P15.1 P16.1 | length 5794
  Top Layer w7.87: P11.1 P10.1 P9.1 4551,5378.58 4534,5361.58 4534,5080 4506.52,5052.52 4389.52,5052.52 4361,5024 v1(4361,4618) 4361,4544 4401.06,4503.94 P14.1 P15.1 P16.1
  Bottom Layer w7.87: *1.2 2606,4794 3013,4794 3042.91,4764.09 3042.91,4689.29 3074.29,4657.91 3136,4657.91 3234.43,4756.34 3660.25,4756.34 3693,4723.59 3693,4669 ; 3693,4669 4310,4669 v1(4361,4618) 3693,4618 3693,4669
Y2: *1.3 U6.13 | length 184
  Top Layer w7.87: *1.3 2630,4785 U6.13
Y2_N: *1.4 P9.2 P10.2 P11.2 P14.2 P15.2 P16.2 | length 4766.8
  Top Layer w7.87: v1(4380,4968) v1(4380,4733) 4380,4592 4418.85,4553.15 P14.2 P15.2 P16.2 ; v1(4504.94,5092.94) 4504.94,5414.94 4517.8,5427.8 P9.2 P10.2 P11.2
  Bottom Layer w7.87: *1.4 2779,4821 3057.66,4821 3058.66,4820 3058.66,4697.88 3082.88,4673.66 3120,4673.66 3218.43,4772.09 3689.91,4772.09 3705.66,4756.34 4356.66,4756.34 v1(4380,4733) ; v1(4380,4968) v1(4504.94,5092.94)
Y3: *1.5 U6.12 | length 167.4
  Top Layer w7.87: U6.12 2830,4745 *1.5
Y3_N: *1.6 P9.3 P10.3 P11.3 P14.3 P15.3 P16.3 | length 5010.8
  Top Layer w7.87: *1.6 2930,4946 v1(3036,5052) ; v1(4247,5052) 4294,5099 4457,5099 4478,5120 4478,5453.01 4502,5477.01 P9.3 P10.3 5391.99,5477.01 5415,5477.01 P11.3 ; P14.3 P15.3 P16.3 5576.36,4602.36 5636,4662 v1(5636,5233)
  Bottom Layer w7.87: v1(3036,5052) v1(4247,5052) ; v1(5435,5477.01) 5435,5434 v1(5636,5233)
Y4: *1.9 U6.11 | length 478.1
  Top Layer w7.87: U6.11 2900,4784 2887.09,4796.91 2887.09,5127.09 *1.9
Y4_N: *1.8 P9.4 P10.4 P11.4 P14.4 P15.4 P16.4 | length 4316
  Top Layer w7.87: v1(4459,5128) 4459,5473.22 4512,5526.22 P9.4 P10.4 P11.4 ; v1(4495,4762) 4495,4668.57 4512,4651.57 P14.4 P15.4 P16.4
  Bottom Layer w7.87: *1.8 3088,5112 4443,5112 ; v1(4459,5128) 4443,5112 ; v1(4495,4762) 4352,4905 4352,5021 4443,5112
Y5: *1.11 U6.10 | length 749.2
  Top Layer w7.87: *1.11 2871.34,5028.66 2871.34,4842.34 2858,4829 2858,4672 2891,4639 2924,4639 U6.10
Y5_N: *1.10 P9.5 P10.5 P11.5 P14.5 P15.5 P16.5 | length 4903.2
  Top Layer w7.87: v1(4168,5022) 4386.79,5240.79 4386.79,5485.23 4477,5575.43 P9.5 P10.5 P11.5 5483,5575.43 5492,5566.43 5492,5345 5489,5342 5489,5043 5496,5036 5496,4712.79 5484,4700.79 P16.5 P15.5 P14.5
  Bottom Layer w7.87: *1.10 2978,5022 v1(4168,5022)
Y6: *1.13 U6.9 | length 902
  Bottom Layer w7.87: *1.13 2694,5006 3054,5006 3100,4960 U6.9
Y6_N: *1.12 P9.6 P10.6 P11.6 P14.6 P15.6 P16.6 | length 5468.4
  Top Layer w7.87: v1(4154,5082) 4369.61,5297.61 4369.61,5492 4502.25,5624.65 P9.6 P10.6 P11.6 5539,5624.65 5701,5462.65 v1(5701,5194) ; P14.6 P15.6 v1(5257,4750) P16.6
  Bottom Layer w7.87: *1.12 2688,5112 2752,5112 2788,5148 2788,5200 2800,5212 2960,5212 2980,5192 2980,5106 3004,5082 v1(4154,5082) ; v1(5257,4750) v1(5701,5194)
Y7: *2.1 U6.7 | length 1031.8
  Top Layer w7.87: U6.7 3050,4365 3458,4365 3477,4384 3477,4441 3380,4538 *2.1
Y7_N: *2.2 P9.7 P10.7 P11.7 P14.7 P15.7 P16.7 | length 4901.3
  Top Layer w7.87: *2.2 3522,4912 3618,4912 3634,4896 3634,4786 3693.66,4726.34 3693.66,4692 3712,4673.66 3760,4673.66 3776.34,4690 3776.34,4732.8 3760,4749.14 3760,4821 3738.66,4842.34 3738.66,4896 3754.66,4912 3883,4912 4265,5294 4265,5504 4434.86,5673.86 P9.7 P10.7 P11.7 ; v2(4440,4770) 4456.82,4770 4486.04,4799.21 P14.7 P15.7 P16.7
  Bottom Layer w7.87: *2.2 3562.16,4787.84 3717.74,4787.84 3733.49,4772.09 4437.91,4772.09 v2(4440,4770)
Y8: *2.3 U7.14 | length 173.6
  Top Layer w7.87: U7.14 3580,4760 *2.3
Y8_N: *2.4 P9.8 P10.8 P11.8 P14.8 P15.8 P16.8 | length 4231.9
  Top Layer w7.87: *2.4 3680,5005 3825,5150 3825,5184 3857,5216 3898,5216 3930,5184 3930,5150.66 3952,5128.66 4000,5128.66 4215.96,5344.62 4215.96,5520.03 4419,5723.07 P9.8 P10.8 P11.8 ; v1(4429,4800) 4477.42,4848.42 P14.8 P15.8 P16.8
  Bottom Layer w7.87: *2.4 3750,4800 v1(4429,4800)
Y9: *2.5 U7.13 | length 388.4
  Top Layer w7.87: U7.13 3692.09,4657.91 3776,4657.91 3792.09,4674 3792.09,4772.09 3780,4784.18 *2.5
Y9_N: *2.6 P9.9 P10.9 P11.9 P14.9 P15.9 P16.9 | length 3846
  Top Layer w7.87: *2.6 4297,5287 v1(4297,5441) ; v1(4197,5525) 4444.28,5772.28 P9.9 P10.9 P11.9 ; v1(4399,4828) 4468.64,4897.64 P14.9 P15.9 P16.9
  Bottom Layer w7.87: *2.6 3922,4828 v1(4399,4828) ; v1(4197,5525) 4213,5525 v1(4297,5441)
Y10: *2.9 U7.12 | length 525.1
  Top Layer w7.87: U7.12 3735,4801.11 3722.91,4813.2 3722.91,5012.91 *2.9
Y10_N: *2.8 P9.10 P10.10 P11.10 P14.10 P15.10 P16.10 | length 3650.9
  Top Layer w7.87: *2.8 4148.5,5338.5 4148.5,5531.99 4438,5821.5 P9.10 P10.10 P11.10 ; P14.10 v1(4690.15,4946.85) P15.10 P16.10
  Bottom Layer w7.87: *2.8 4443.31,5170 ; v1(4690.15,4946.85) 4524,5113 ; 4443.31,5170 4500.31,5113 4524,5113 ; 4443.31,5170 4467,5170 4524,5113
pads on no net: *2.10 *2.12 P4.0 P7.0 P9.0 P10.0 P11.0 P14.0 P15.0 P16.0 U1.2 U1.38 U5.12 U5.13 U5.14 U5.15 U5.16 U5.17 U6.15 U7.7 U7.9 U7.10 U7.11 U7.15 Y1.

## Keep-outs
Keep-Out Layer:
  lines w7: 5345,2950 5345,4275 5847.64,4275
  lines w10: 5345,2950 2050,2950 2050,6099.61 5847.64,6099.61 5847.64,4275

## Silkscreen, mask and mechanical layers (free items; w line width, h text height)
Top Overlay:
  text "3.3" at 4570,6070 h80 r180
  text "+" at 4105,6050 h80 r180
  text "+" at 2940,5880 h80 r270
  text "5v" at 3245,5830 h80 r270
  text "RST" at 2150,5300 h80 r270
  text "+" at 4030,4040 h80 r270
  text "+" at 2270,3960 h80
  text "180v" at 3945,3650 h80 r270
  text "3.3" at 2260,3645 h80 r270
  text "-" at 2220,3630 h80 r90
  text "+" at 2170,3525 h80
  text "+" at 4030,3520 h80 r270
  text "-" at 2220,3165 h80 r90
Drill Drawing:
  text ".LEGEND" at 6097.64,3200 h60
  text "Drill Drawing." at 6097.64,3100 h60

## Text inside footprints (layer, text, board x,y; h text height)
D1: Top Overlay "+" at 2796,6039 h30 r270